# Allegro board OSCILATOR3.brd
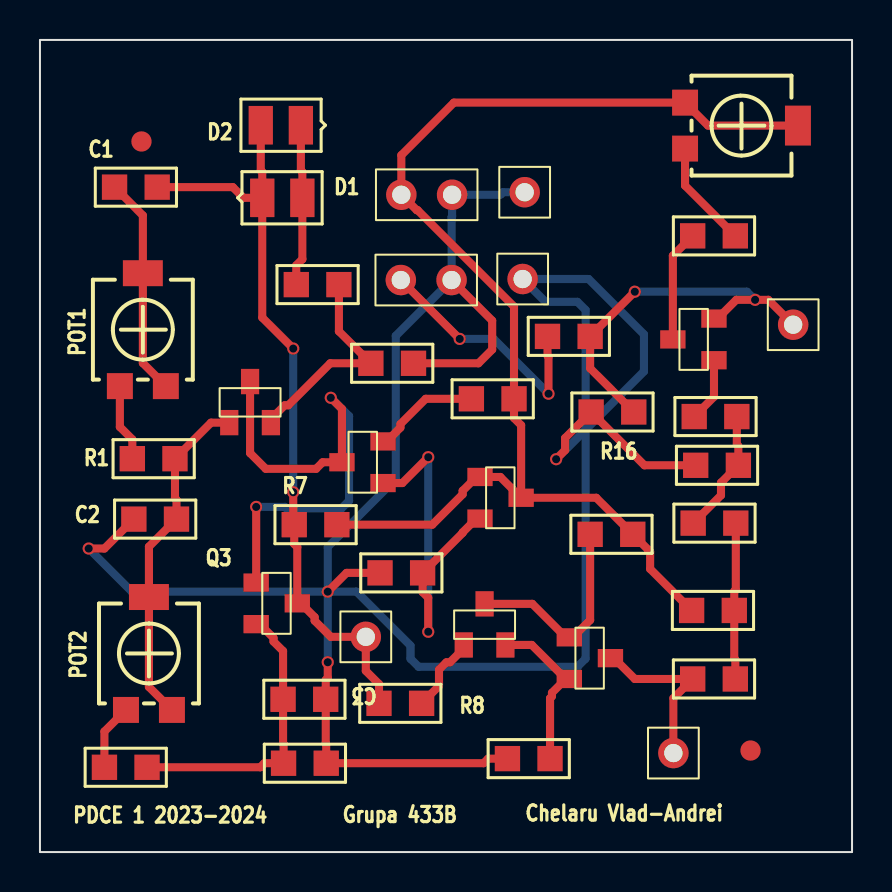
[diagram p0: board, top side]
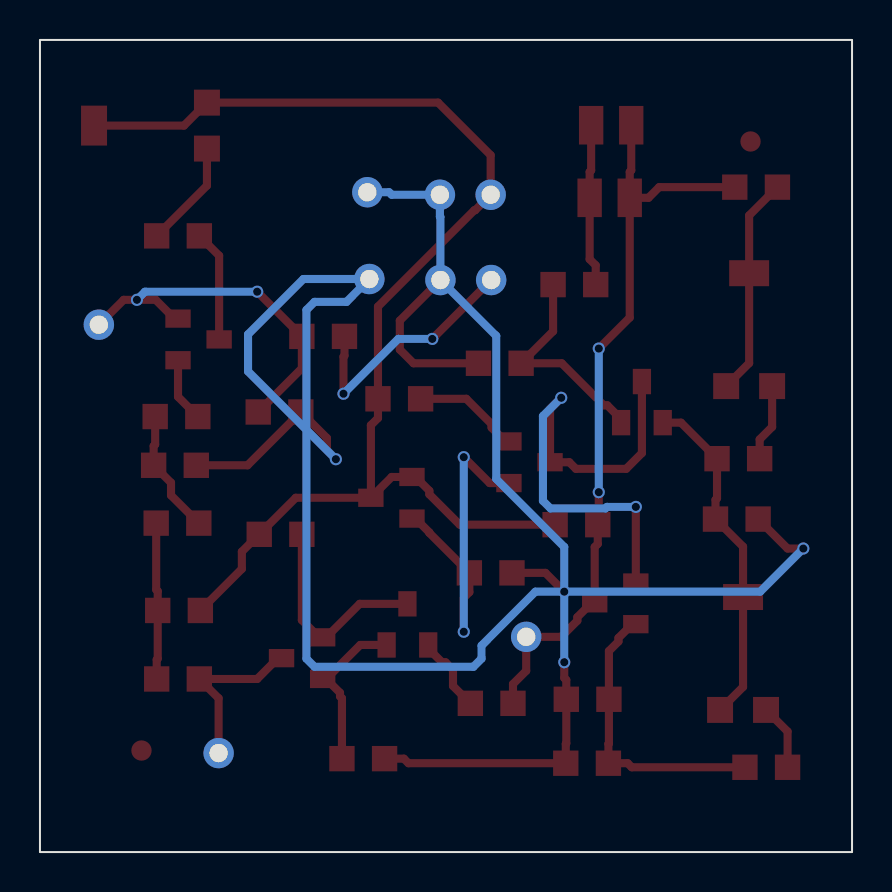
[diagram p1: board, bottom side, seen from below]

Outline 40.64 x 40.64 mm; copper layers: TOP, BOTTOM. Coordinates in mm from the lower left corner of the outline.
Outline path: rectangle 0,0 40.64,40.64

## Design rules (mm)
constraint set DEFAULT: min track width 0.127
nets with their own width: min track width 0.127; nets GND N94501 N94669 N94751 N94781 N95079 N95085 N95089

## Placement (name value [footprint] x y rotation side)
C1  220n  [SMC0805]  3.73 33.27 0 top
C2  220n  [SMC0805]  4.7 16.66 0 top
C3  4.7u  [SMC0805]  14.3 7.65 180 top
C4  4.7u  [SMC0805]  14.96 28.4 180 top
C5  470n  [SMC0805]  32.82 19.35 0 top
C6  1n  [SMC0805]  27.53 25.81 180 top
D1  D1N4148  [SMD0805]  11.13 32.74 0 top
D2  D1N4148  [SMD0805]  13.06 36.37 180 top
DZ  BZX84C2V7  [TO236AB]  22.02 18.77 180 top
J1  LOAD  [JUMPER2]  18.06 28.63 0 top
J2  VCC  [JUMPER2]  18.08 32.89 0 top
J3  GND  [JUMPER1]  24.16 28.68 0 top
J4  GND  [JUMPER1]  24.26 33.02 0 top
J5  SIN  [JUMPER1]  16.31 10.77 0 top
J6  SQUARE  [JUMPER1]  31.7 4.95 0 top
J7  TRIANGLE  [JUMPER1]  37.69 26.39 0 top
NOREF  -  [unnamed]  5.08 35.56 0 top
NOREF#2  -  [#2]  40.64 0 90 top
NOREF#3  -  [#2]  0 0 0 top
NOREF#4  -  [unnamed]  35.56 5.08 0 top
POT1  10k  [TS53YL]  6.3 23.32 270 top
POT2  10k  [TS53YL]  6.6 7.11 270 top
POT3  10k  [TS53YL]  32.28 35.2 180 top
Q1  BC856B  [TO236AB]  17.17 18.47 0 top
Q2  BC846B  [TO236AB]  9.47 21.49 270 top
Q3  BC846B  [TO236AB]  10.82 13.49 180 top
Q4  BC846B  [TO236AB]  21.21 10.36 270 top
Q5  BC846B  [TO236AB]  26.49 10.74 180 top
Q6  BC856B  [TO236AB]  33.73 24.61 0 top
R1  100  [SMR0805]  6.76 19.68 180 top
R2  100  [SMR0805]  5.36 4.24 180 top
R3  3.3k  [SMR0805]  16.56 24.46 0 top
R4  220  [SMR0805]  14.33 4.45 180 top
R5  2.2k  [SMR0805]  17.02 13.97 0 top
R6  2k  [SMR0805]  21.59 22.68 0 top
R7  220  [SMR0805]  12.73 16.38 0 top
R8  150k  [SMR0805]  16.97 7.44 0 top
R9  1k  [SMR0805]  27.53 15.9 0 top
R10  4.7k  [SMR0805]  32.66 8.66 0 top
R11  1k  [SMR0805]  34.75 12.09 180 top
R12  51  [SMR0805]  23.39 4.67 0 top
R13  4.7k  [SMR0805]  32.69 16.46 0 top
R14  22k  [SMR0805]  32.74 21.79 0 top
R15  1k  [SMR0805]  32.66 30.84 0 top
R16  100k  [SMR0805]  27.58 22.02 0 top

## Library data of the parts
C1-C6 = C
D1 = D1N4148_3
D2 = D1N4148_2
DZ = BZX84C2V7_1
J1 J2 = CON2: User Part Number: ***
J3-J7 = CON1: User Part Number: ***
POT1-POT3 = POT
Q1 Q6 = BC856B
Q2-Q5 = BC846B
R1-R16 = R

## Footprints (pads in the part's own frame, mm; a bottom-side part is the same pattern mirrored in y, then rotated)
JUMPER1
  round 1.524 hole 0.914: 1(0,0)
JUMPER2
  round 1.524 hole 0.914: 1(0,0) 2(2.54,0)
SMC0805
  rect 1.27x1.27 smd: 1(0,0) 2(2.134,0)
SMD0805
  rect 1.219x1.93 smd: A(2.007,0) C(0,0)
SMR0805
  rect 1.27x1.27 smd: 1(0,0) 2(2.134,0)
TO236AB
  rect 1.27x0.914 smd: 1(0,0) 2(0,2.083) 3(-2.057,1.041)
TS53YL
  rect 1.3x1.3 smd: 1(0,0) 3(0,-2.3)
  rect 1.3x2 smd: 2(-5.65,-1.15)
unnamed
  round 1.016 smd: (0,0)

## Nets
GND: C2.1 C3.1 C5.1 J1.2 J2.2 J3.1 J4.1 R3.2 R4.1 R5.1 R12.1 R16.1
N94313: DZ.1 DZ.3(PLUS) J2.1 POT3.2(T) POT3.3 R6.2 R7.2 R9.2 R11.2
N94383: C1.2 D1.C D2.A J5.1 Q3.3 R7.1 R8.1
N94397: POT3.1 R15.2
N94495: Q6.3 R15.1
N94501: C1.1 POT1.1 POT1.2(T)
N94547: R10.2 R11.1 R13.2
N94637: C5.2 R13.1 R14.2
N94669: Q4.3 Q5.1 R9.1
N94751: Q1.2(E) R6.1
N94757: C6.1 J7.1 Q6.2(E) R16.2
N94781: POT1.3 R1.2
N94831: J6.1 Q5.3 R10.1
N94841: C6.2 J1.1
N94865: C4.2 D1.A D2.C
N95013: DZ.2 Q1.1 R5.2
N95079: Q4.1 R8.2
N95085: Q4.2(E) Q5.2(E) R12.2
N95089: Q1.3 Q2.3 Q3.1
N95235: C3.2 Q3.2(E) R2.1 R4.2
N95241: C2.2 POT2.1 POT2.2(T) Q2.1 R1.1
N95307: C4.1 Q2.2(E) R3.1
N95407: POT2.3 R2.2
N945811: Q6.1 R14.1

## Via types
v1: diameter 0.61, hole 0.406, TOP to BOTTOM, 14 vias

## Routing (per net, layer and track width the routed paths; a pad name or vN(x,y) marks a point on that pad's centre or on a via; arc(x,y) is an arc through that point)
GND: length 132.2
  TOP w0.406: R5.1 15.34,13.97 v1(14.4,13.03) ; J1.2 22.63,26.59 22.63,25.15 21.95,24.46 R3.2 ; C2.1 3.23,15.19 v1(2.44,15.19) ; C5.1 30.25,19.35 R16.1 26.28,20.72 26.28,20.11 v1(25.83,19.66) ; v1(14.4,9.5) 14.4,8.71 14.3,8.61 C3.1 14.3,5.44 14.33,5.41 R4.1 22.2,4.45 22.43,4.67 R12.1
  BOTTOM w0.406: v1(14.4,13.03) 14.4,15.27 17.81,18.67 17.81,25.83 J1.2 20.6,31.78 20.62,31.8 J2.2 23.04,32.89 23.16,33.02 J4.1 ; v1(14.4,13.03) 15.84,13.03 18.54,10.33 18.54,9.68 18.95,9.27 26.9,9.27 27.3,9.68 27.3,27.13 26.9,27.53 25.3,27.53 J3.1 27.46,28.68 30.23,25.91 30.23,24.05 v1(25.83,19.66) ; v1(14.4,13.03) 4.6,13.03 v1(2.44,15.19) ; v1(14.4,13.03) v1(14.4,9.5)
N94313: length 63.2
  TOP w0.406: POT3.2 33.43,36.35 POT3.3 20.71,37.5 18.08,34.87 J2.1 18.86,32.12 18.9,32.12 23.72,27.3 R6.2 23.72,21.72 24.08,21.36 DZ.3 ; R7.2 19.63,16.38 21.15,17.9 21.15,18.08 21.84,18.77 DZ.1 23.04,18.77 DZ.3 ; DZ.3 27.84,17.73 R9.2 30.54,15.03 30.54,14.17 R11.2
N94383: length 38
  TOP w0.406: v1(12.67,25.2) 11.13,26.75 D1.C ; R8.1 16.97,8.41 16.31,9.07 J5.1 14.55,10.77 13.75,11.58 13.75,11.76 13.06,12.45 Q3.3 12.88,15.27 12.73,15.42 R7.1 12.67,16.43 v1(12.67,18.01) ; D2.A 11.05,34.11 11.13,34.04 D1.C ; C1.2 9.65,33.27 10.19,32.74 D1.C
  BOTTOM w0.406: v1(12.67,25.2) v1(12.67,18.01)
N94397: length 5.4
  TOP w0.406: R15.2 32.28,33.35 POT3.1
N94495: length 5.6
  TOP w0.406: R15.1 31.67,29.84 Q6.3
N94501: length 11
  TOP w0.406: POT1.1 5.15,24.47 POT1.2 5.15,31.86 C1.1
N94547: length 7.9
  TOP w0.406: R10.2 34.8,9.63 34.75,9.68 R11.1 34.75,13.06 34.82,13.13 R13.2
N94637: length 6.3
  TOP w0.406: R13.1 34.08,17.85 34.08,18.49 C5.2 34.95,20.32 34.87,20.4 R14.2
N94669: length 10.6
  TOP w0.406: R9.1 27.53,11.61 26.67,10.74 Q5.1 26.31,10.74 24.64,12.42 Q4.3
N94751: length 5.4
  TOP w0.406: R6.1 19.3,22.68 18.04,21.42 18.04,21.24 17.35,20.55 Q1.2
N94757: length 18.9
  TOP w0.406: R16.2 27.53,24.21 C6.1 v1(29.77,28.04) ; Q6.2 33.91,26.7 34.85,27.64 v1(35.79,27.64) 36.45,27.64 J7.1
  BOTTOM w0.406: v1(29.77,28.04) 35.38,28.04 v1(35.79,27.64)
N94781: length 3.9
  TOP w0.406: POT1.3 4,21.27 4.62,20.65 R1.2
N94831: length 8.7
  TOP w0.406: J6.1 31.7,7.7 R10.1 29.77,8.66 28.73,9.7 Q5.3
N94841: length 12.6
  TOP w0.406: C6.2 25.4,24.84 25.45,24.79 v1(25.45,22.94) ; J1.1 v1(21.01,25.68)
  BOTTOM w0.406: v1(25.45,22.94) 22.71,25.68 v1(21.01,25.68)
N94865: length 8.1
  TOP w0.406: D2.C 13.06,34.11 13.13,34.04 D1.A 13.13,29.67 12.83,29.36 C4.2
N95013: length 18.6
  TOP w0.406: v1(19.43,19.76) 18.14,18.47 Q1.1 ; DZ.2 21.84,16.69 21.15,16 21.15,15.97 R5.2 19.15,13 19.43,12.73 v1(19.43,11.02)
  BOTTOM w0.406: v1(19.43,19.76) v1(19.43,11.02)
N95079: length 3.9
  TOP w0.406: R8.2 19.97,8.31 19.97,9.12 20.34,9.49 20.52,9.49 21.21,10.19 Q4.1
N95085: length 8.2
  TOP w0.406: Q5.2 26.31,8.66 ; 26.31,8.66 24.61,10.36 Q4.2 ; 26.31,8.66 25.62,7.97 25.62,7.79 25.53,7.7 R12.2
N95089: length 26.3
  TOP w0.406: Q2.3 10.52,19.96 11.3,19.18 13.82,19.18 14.15,19.51 15.11,19.51 15.11,22.17 v1(14.55,22.73) ; Q3.1 v1(10.82,17.27)
  BOTTOM w0.406: v1(14.55,22.73) 15.47,21.82 15.47,17.58 15.09,17.2 12.34,17.2 12.26,17.27 v1(10.82,17.27)
N95235: length 14.5
  TOP w0.406: Q3.2 11,11.4 11.69,10.71 11.69,10.54 12.17,10.06 C3.2 12.17,5.44 12.19,5.41 R4.2 11.23,4.45 11.02,4.24 R2.1
N95241: length 17.1
  TOP w0.406: POT2.1 5.45,8.26 POT2.2 5.45,15.28 C2.2 6.83,17.63 6.76,17.7 R1.1 8.56,21.49 Q2.1
N95307: length 10.9
  TOP w0.406: Q2.2 11.56,21.67 12.25,22.36 12.43,22.36 14.53,24.46 R3.1 14.96,26.06 C4.1
N95407: length 3.3
  TOP w0.406: POT2.3 3.23,6.03 R2.2
N945811: length 3.2
  TOP w0.406: R14.1 33.73,22.78 Q6.1

## Text on the board
Ref Des/Silkscreen Top: PDCE 1 2023-2024 | Grupa 433B | Chelaru Vlad-Andrei
XSECTION_CHART: *  SURFACE - 0 MIL | L1 TOP CONDUCTOR - 0.0007 MIL | *  DIELECTRIC - 29.999 MIL | L2 BOTTOM CONDUCTOR - 0.0007 MIL | DESIGN CROSS SECTION CHART | ___________________________ | TOTAL THICKNESS 60 MIL | 1-2
DIMENSION: FIGURE | FINISHED_SIZE | 16.0 | 36.0 | DRILL CHART: TOP to BOTTOM | ALL UNITS ARE IN MILS | PLATED | QTY | 6 | 9
